# EAGLE board OLD LiFePo4 Charger Single to Chain 2.2 SMD -- Finished (EAGLE 6.2)
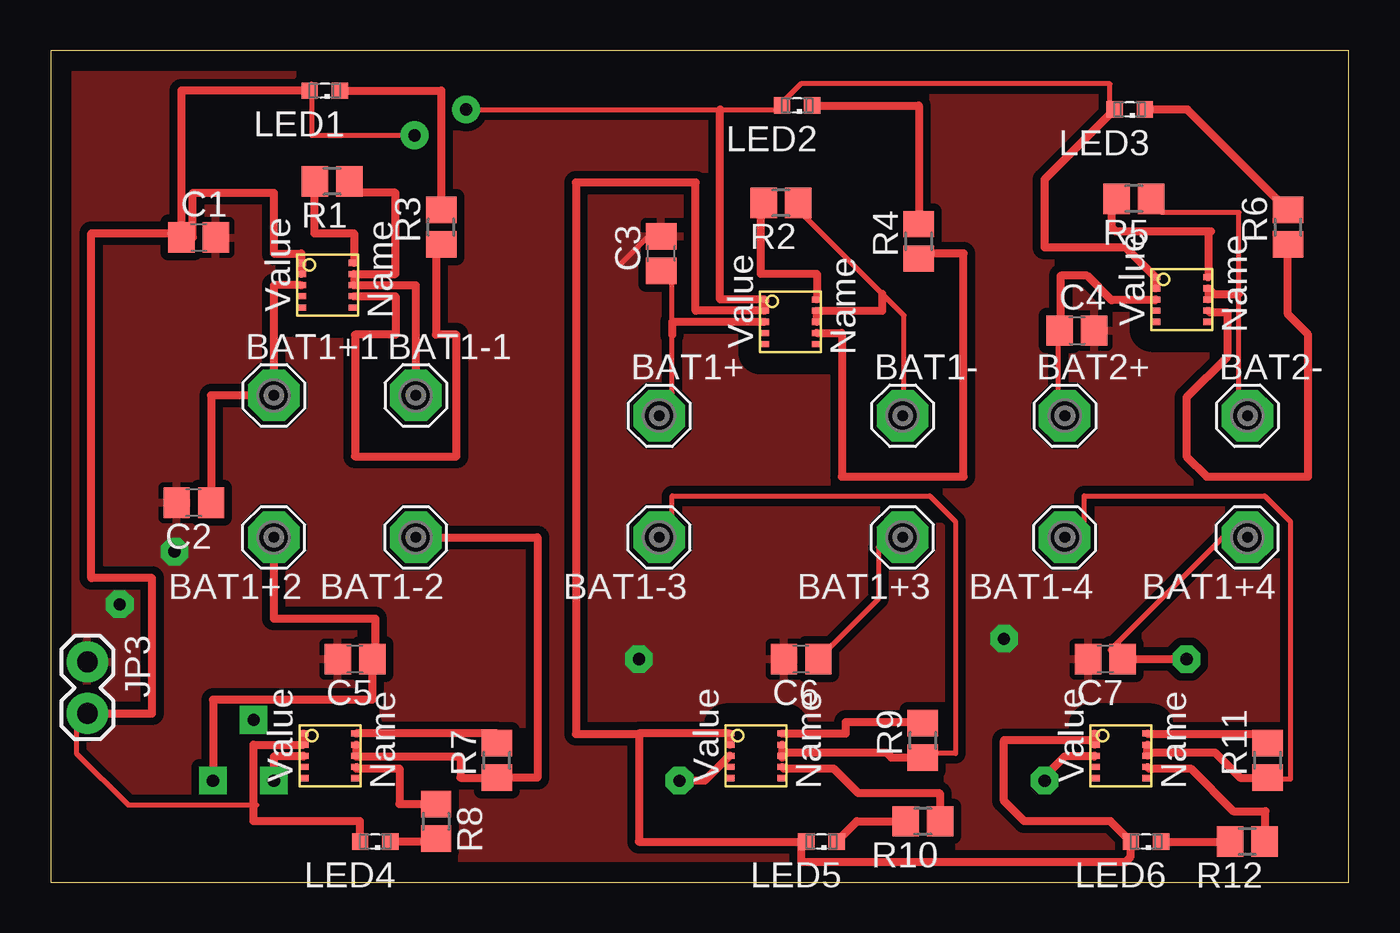
[diagram p0: board, top side]
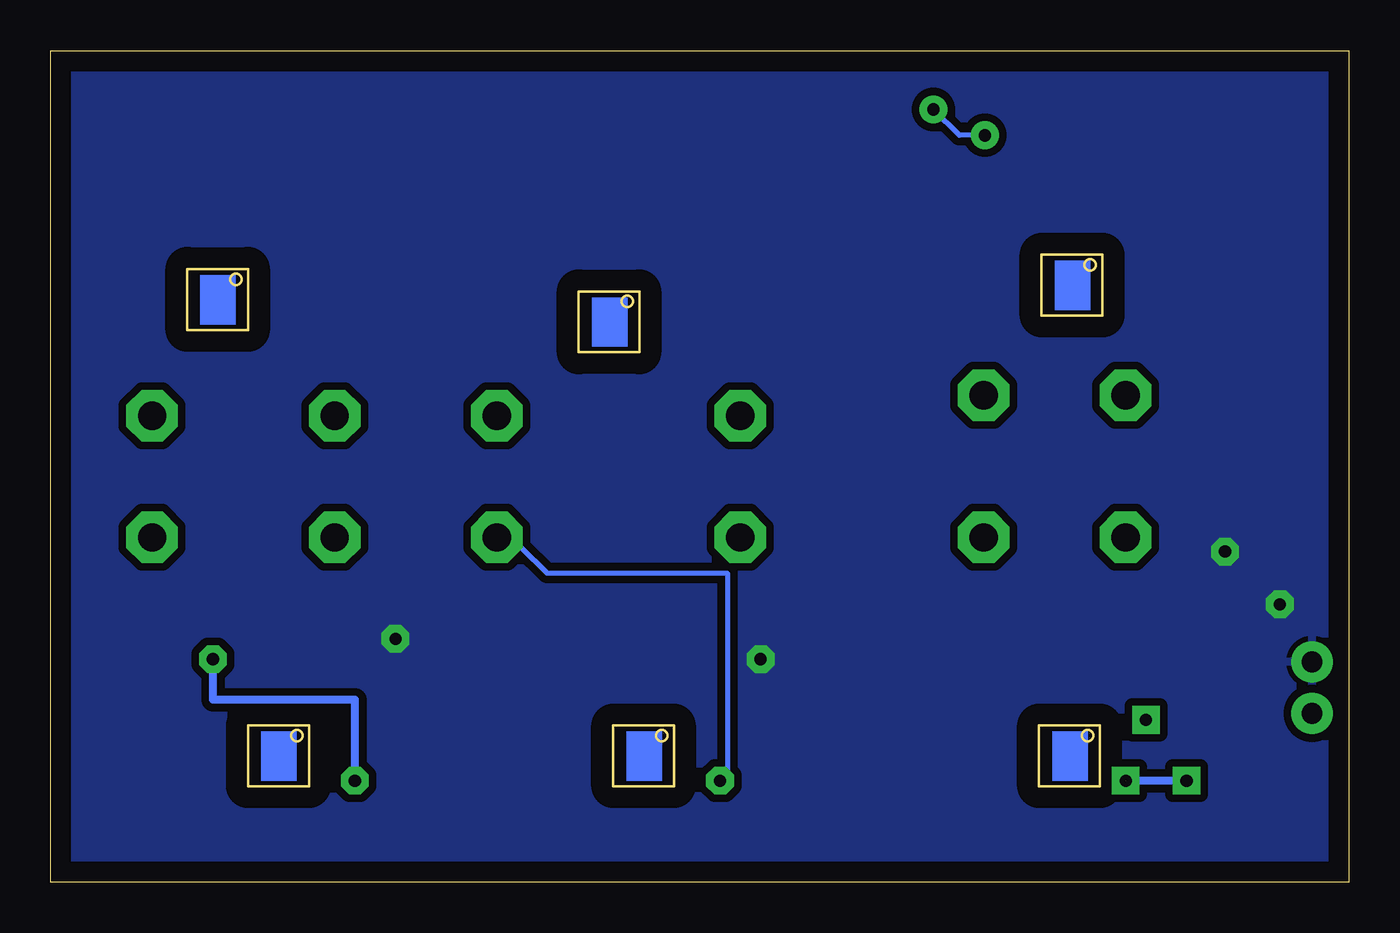
[diagram p1: board, bottom side, seen from below]

Size 64 x 41 mm. Coordinates in mm from the lower left corner, seen from the top.
Outline: 0,0 64,0 64,41 0,41 0,0
Copper layers (1*16): Top 0.035mm / dielectric 1.5mm / Bottom 0.035mm
Design rules: minimum track width 10mil, minimum drill 24mil, track to track 15mil, track to pad 12mil, pad to pad 12mil, via to via 12mil, smd to smd 12mil, copper to edge 40mil, drill to drill 8mil, minimum pad ring 20mil, minimum via ring 15mil, stop-mask expansion 4mil, vias tented up to drill 0mil, thermal gap 10mil

## Footprints (pad centres in the part's own frame; a part is rotated, then mirrored left to right if it is on the bottom)
SE14 = drill 1.397 pad 2.54 octagon: MP 0,0
C0805 = smd 1.3 x 1.5: 1 -0.85,0; 2 0.85,0
1X02 = drill 1.016 pad 1.88: 1 0,0; 2 2.54,0
SML0603 = smd 0.8 x 0.8: A 0.75,0; C -0.75,0
R0805 = smd 1.3 x 1.5: 1 -0.85,0; 2 0.85,0
MCP73123/223 = smd 0.5 x 0.3: 1 1.47,-1.67; 2 1.47,-2.22; 3 1.47,-2.77; 4 1.47,-3.32; 5 1.47,-3.87; 6 4.07,-3.87; 7 4.07,-3.32; 8 4.07,-2.77; 9 4.07,-2.22; 10 4.07,-1.67

## Placement (x,y rotation side)
BAT1+  SE14  [SE14]  30,23 0 top
BAT1+1  SE14  [SE14]  11,24 0 top
BAT1+2  SE14  [SE14]  11,17 180 top
BAT1+3  SE14  [SE14]  42,17 180 top
BAT1+4  SE14  [SE14]  59,17 180 top
BAT1-  SE14  [SE14]  42,23 0 top
BAT1-1  SE14  [SE14]  18,24 0 top
BAT1-2  SE14  [SE14]  18,17 180 top
BAT1-3  SE14  [SE14]  30,17 180 top
BAT1-4  SE14  [SE14]  50,17 180 top
BAT2+  SE14  [SE14]  50,23 0 top
BAT2-  SE14  [SE14]  59,23 0 top
C1  4.7  [C0805]  7.29,31.79 0 top
C2  4.7  [C0805]  7.06,18.71 180 top
C3  4.7  [C0805]  30.1,31 90 top
C4  4.7  [C0805]  50.6,27.2 0 top
C5  4.7  [C0805]  15,11 180 top
C6  4.7  [C0805]  37,11 180 top
C7  4.7  [C0805]  52,11 180 top
JP3  Vraw/Grnd  [1X02]  1.81,10.86 270 top
LED1  3.2v  [SML0603]  13.51,39.03 180 top
LED2  3.2v  [SML0603]  36.8,38.3 180 top
LED3  3.2v  [SML0603]  53.2,38.1 180 top
LED4  3.2v  [SML0603]  16,2 180 top
LED5  3.2v  [SML0603]  38,2 180 top
LED6  3.2v  [SML0603]  54,2 180 top
R1  1.5k  [R0805]  13.88,34.55 180 top
R2  1.5k  [R0805]  36,33.5 180 top
R3  1k  [R0805]  19.25,32.3 90 top
R4  1k  [R0805]  42.8,31.6 90 top
R5  1.5k  [R0805]  53.4,33.7 180 top
R6  1k  [R0805]  61,32.3 90 top
R7  1.5k  [R0805]  22,6 90 top
R8  1k  [R0805]  19,3 270 top
R9  1.5k  [R0805]  43,7 90 top
R10  1k  [R0805]  43,3 180 top
R11  1.5k  [R0805]  60,6 90 top
R12  1k  [R0805]  59,2 180 top
U$1  MCP73123/223  [MCP73123/223]  33.7,30.4 0 top
U$2  MCP73123/223  [MCP73123/223]  53,31.5 0 top
U$3  MCP73123/223  [MCP73123/223]  11,9 0 top
U$5  MCP73123/223  [MCP73123/223]  32,9 0 top
U$6  MCP73123/223  [MCP73123/223]  50,9 0 top
U$8  MCP73123/223  [MCP73123/223]  10.88,32.21 0 top

## Library data of the parts
BAT1+ BAT1+1-BAT1+4 BAT1- BAT1-1-BAT1-4 BAT2+ BAT2- = solpad
C1-C7 R1-R12 = resistor
JP3 = SparkFun
LED1-LED6 = led
U$1-U$3 U$5 U$6 U$8 = untitled

## Nets
GND: C1.2 C2.2 C3.2 C4.2 C5.2 C6.2 C7.2 JP3.1
N$1: C1.1 JP3.2 LED1.A LED2.A LED3.A LED4.A LED5.A LED6.A U$1.1 U$1.2 U$2.1 U$2.2 U$3.1 U$3.2 U$5.1 U$5.2 U$6.1 U$6.2 U$8.1 U$8.2
N$2: BAT1+2.MP C5.1 U$3.3
N$3: BAT1+1.MP C2.1 U$8.3
N$4: R1.2 U$8.10
N$5: BAT1-1.MP R1.1 U$8.8 U$8.9
N$6: LED1.C R3.2
N$7: R3.1 U$8.7
N$8: BAT1+.MP C3.1 U$1.3
N$9: BAT1-.MP R2.1 U$1.8 U$1.9
N$10: R4.1 U$1.7
N$11: R2.2 U$1.10
N$12: BAT2+.MP C4.1 U$2.3
N$13: LED2.C R4.2
N$14: BAT2-.MP R5.1 U$2.8 U$2.9
N$15: R6.1 U$2.7
N$16: R5.2 U$2.10
N$17: LED3.C R6.2
N$19: BAT1-2.MP R7.1 U$3.8 U$3.9
N$20: R8.1 U$3.7
N$21: R7.2 U$3.10
N$22: LED4.C R8.2
N$24: BAT1+3.MP C6.1 U$5.3
N$25: BAT1-3.MP R9.1 U$5.8 U$5.9
N$26: R10.1 U$5.7
N$27: R9.2 U$5.10
N$28: LED5.C R10.2
N$30: BAT1+4.MP C7.1 U$6.3
N$31: BAT1-4.MP R11.1 U$6.8 U$6.9
N$32: R12.1 U$6.7
N$33: R11.2 U$6.10
N$34: LED6.C R12.2

## Tracks (layer width: path | path; a pad name or v marks a point on that pad's centre or on a via)
GND  (via drill 0.6)
  Top 0.254: 28.1,30.48 29.37,31.75 C3.2 | 35.72,11.43 C6.2
  other vias: 29,11 47,12 6.1,16.3 3.4,13.7
  pour Bottom: 0,0 0,41 79,41 79,0
  pour Top: 0,0 0,41 64,41 64,0
N$1  (via drill 0.61)
  Top 0.254: 35.72,38.1 36.99,39.37 52.23,39.37 52.23,38.1 LED3.A | v20.48,38.1 33,38.1 35.72,38.1 | v17.94,36.83 12.86,36.83 12.86,39.37 LED1.A | 35.72,38.1 LED2.A | 10.16,3.81 10,3.81 3.81,3.81 1.27,6.35 1.27,7.62 JP3.2
  Top 0.406: LED1.A 6.44,39.03 C1.1 | C1.1 7,31.79 7,34 11,34 11,31 12.35,31 U$8.1 U$8.2 | 33,38.1 33,28.73 U$1.1 U$1.2 31.8,28.18 31.8,34.5 25.9,34.5 25.9,7.3 29,7.3 | U$5.2 U$5.1 29,7.33 29,7.3 | 29,7.3 29,2 LED5.A 37,1.75 37,1 53,1 53.25,1.25 LED6.A 52.25,3 48,3 47,4 47,7 51.25,7 U$6.2 U$6.1 | U$2.2 U$2.1 53,31.3 49,31.3 49,34.65 LED3.A | C1.1 6.44,32 2,32 2,15 5,15 5,8.32 JP3.2 | LED4.A 15.25,3 10,3 10,3.81 10,6.78 U$3.2 U$3.1
  Bottom 0.254: v20.48,38.1 19.21,36.83 v17.94,36.83
N$2  (via drill 0.6)  (1 unrouted)
  Top 0.406: BAT1+2.MP 11,13 16,13 16,11 C5.1 15.85,9 8,9 v8,5 | U$3.3 12.47,6.2 11,6.2 11,5
  Bottom 0.406: v8,5 11,5
N$3
  Top 0.406: U$8.3 11,29.44 BAT1+1.MP 7.91,24 C2.1
N$4
  Top 0.406: R1.2 13,34.55 13,32 14.95,32 U$8.10
N$5
  Top 0.406: BAT1-1.MP 18,29.44 U$8.8 U$8.9 17,29.99 17,34 14.73,34 R1.1
N$6
  Top 0.406: LED1.C 19.25,39.03 R3.2
N$7
  Top 0.406: R3.1 19,31.45 19,27 20,27 20,21 15,21 15,27 17,27 17,28.89 U$8.7
N$8
  Top 0.254: C3.1 30.64,30.48 30.64,27 30.64,24.13 BAT1+.MP
  Top 0.406: U$1.3 30.64,27.63 30.64,27
N$9
  Top 0.254: R2.1 36.99,33.02 41.01,29 42.07,27.94 42.07,24.13 BAT1-.MP
  Top 0.406: U$1.8 U$1.9 41.01,28.18 41.01,29
N$10
  Top 0.406: U$1.7 39,27.08 39,20 45,20 45,31 42.8,31 R4.1
N$11
  Top 0.406: R2.2 35,33.5 35,30 37.77,30 U$1.10
N$12
  Top 0.254: C4.1 49.69,26.67 49.69,24.13 BAT2+.MP
  Top 0.406: C4.1 49.8,27.25 49.8,29.9 51.1,29.9 52.3,28.7 54.44,28.7 U$2.3
N$13
  Top 0.406: LED2.C 42.8,38.3 R4.2
N$14
  Top 0.254: R5.1 54.77,33.02 58.58,33.02 58.58,29 58.58,24.13 BAT2-.MP
  Top 0.406: U$2.8 U$2.9 57.35,29 58.58,29
N$15
  Top 0.406: U$2.7 57.15,28.1 58,28.1 58,25.9 56,23.9 56,21 57,20 62,20 62,27 61,28 R6.1
N$16
  Top 0.406: R5.2 52.3,33.45 52.3,32.3 52.5,32.1 57.2,32.1 57.07,31.97 U$2.10
N$17
  Top 0.406: R6.2 56.05,38.1 LED3.C
N$18  (via drill 0.6)
  other vias: 10,8
N$19
  Top 0.406: BAT1-2.MP 24,17 24,5.15 R7.1 20.2,5.15 20.2,6.2 15.07,6.2 U$3.8 U$3.9
N$20
  Top 0.406: U$3.7 15.07,5.6 17.2,5.6 17.2,3.85 R8.1
N$21
  Top 0.406: R7.2 22,7.33 U$3.10
N$22
  Top 0.406: R8.2 19,2 LED4.C
N$24  (via drill 0.6)
  Top 0.254: C6.1 38.26,11.43 40.8,13.97 40.8,16.51 BAT1+3.MP
  Top 0.406: U$5.3 32.24,5 v31,5
  Bottom 0.254: v31,5 30.64,5.08 30.64,15.24 39.53,15.24 40.8,16.51 BAT1+3.MP
N$25
  Top 0.254: R9.1 43.34,6.35 44.61,6.35 44.61,17.78 43.34,19.05 30.64,19.05 30.64,17.78 BAT1-3.MP
  Top 0.406: 36.07,6.15 U$5.8 | U$5.8 U$5.9 | R9.1 41.45,6.15 41.2,6.4 36.07,6.4 U$5.8
N$26
  Top 0.406: U$5.7 36.15,5.6 38.6,5.6 39.8,4.4 43.8,4.4 43.85,4.35 R10.1
N$27
  Top 0.406: U$5.10 39.2,7.33 39.2,7.9 43,7.9 R9.2
N$28
  Top 0.406: LED5.C 39.75,3 R10.2
N$29  (via drill 0.6)
  other vias: 11,5
N$30  (via drill 0.6)
  Top 0.254: C7.1 52.23,11.43 58.58,17.78 BAT1+4.MP
  Top 0.406: U$6.3 51.44,6.2 50,6.2 49,5.2 v49,5 | C7.1 v56,11
  Bottom 0.406: v49,5 49,9 56,9 v56,11
N$31
  Top 0.254: R11.1 59.85,5.08 61.12,5.08 61.12,17.78 59.85,19.05 50.96,19.05 50.96,17.78 BAT1-4.MP
  Top 0.406: U$6.9 U$6.8 54.24,6.4 57.4,6.4 58.65,5.15 R11.1
N$32
  Top 0.406: U$6.7 54.15,5.6 56.2,5.6 58.3,3.5 59.9,3.5 59.85,3.45 R12.1
N$33
  Top 0.406: U$6.10 54.1,7.3 59.7,7.3 60,7 R11.2
N$34
  Top 0.406: LED6.C R12.2
(copper drawn outside any net)
  shapes: Bottom circle x2, Top circle x2